# Altium PCB main_board_2018-12-19.PcbDoc
Units mm, origin at the board's own origin, x right, y up, seen from the top; angles counter-clockwise.
Board outline 60.01 x 79.7 mm, 2 copper layers (Top Layer, Bottom Layer); 86 components, 70 nets, 351 pads, 182 vias.
Unrouted connection lines stored in the file: 3.
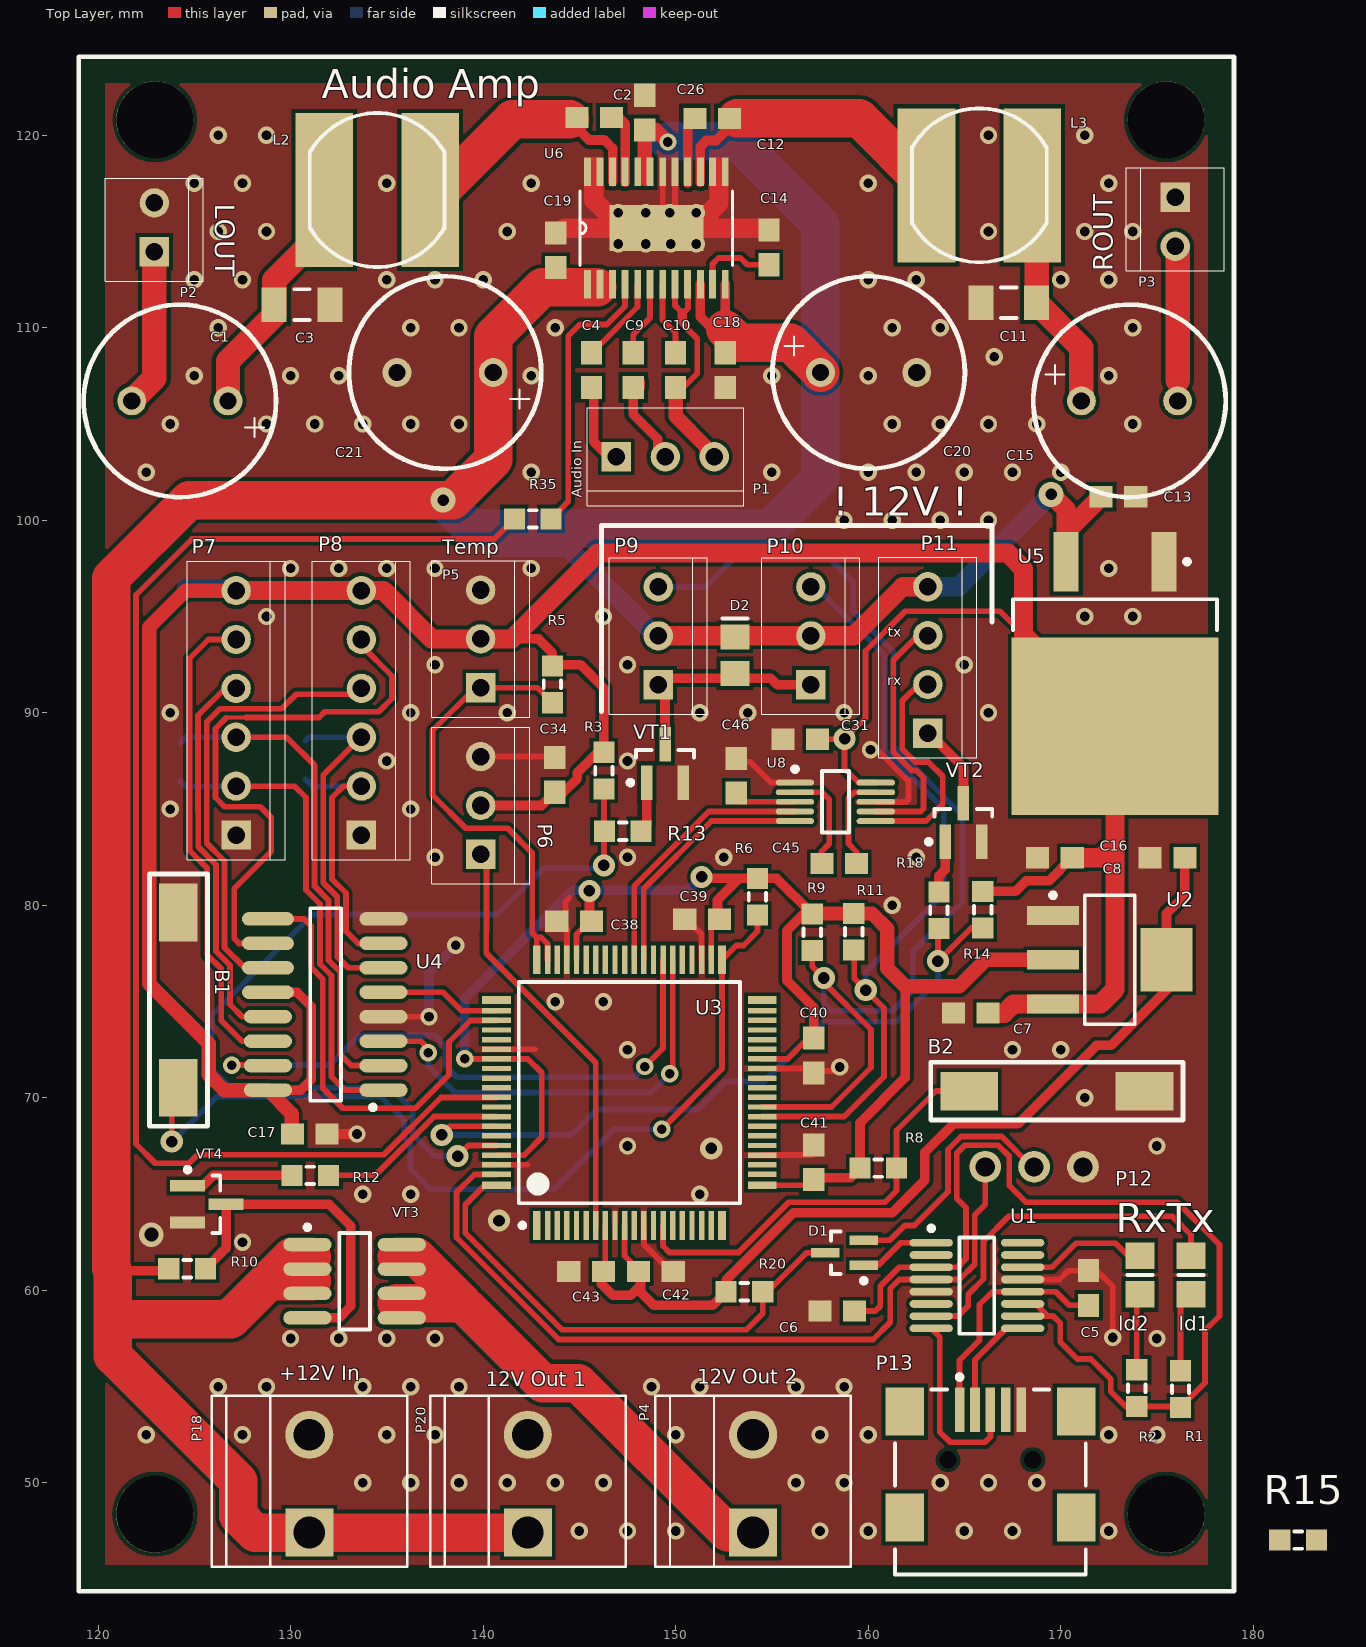
[diagram p0: Top Layer view]
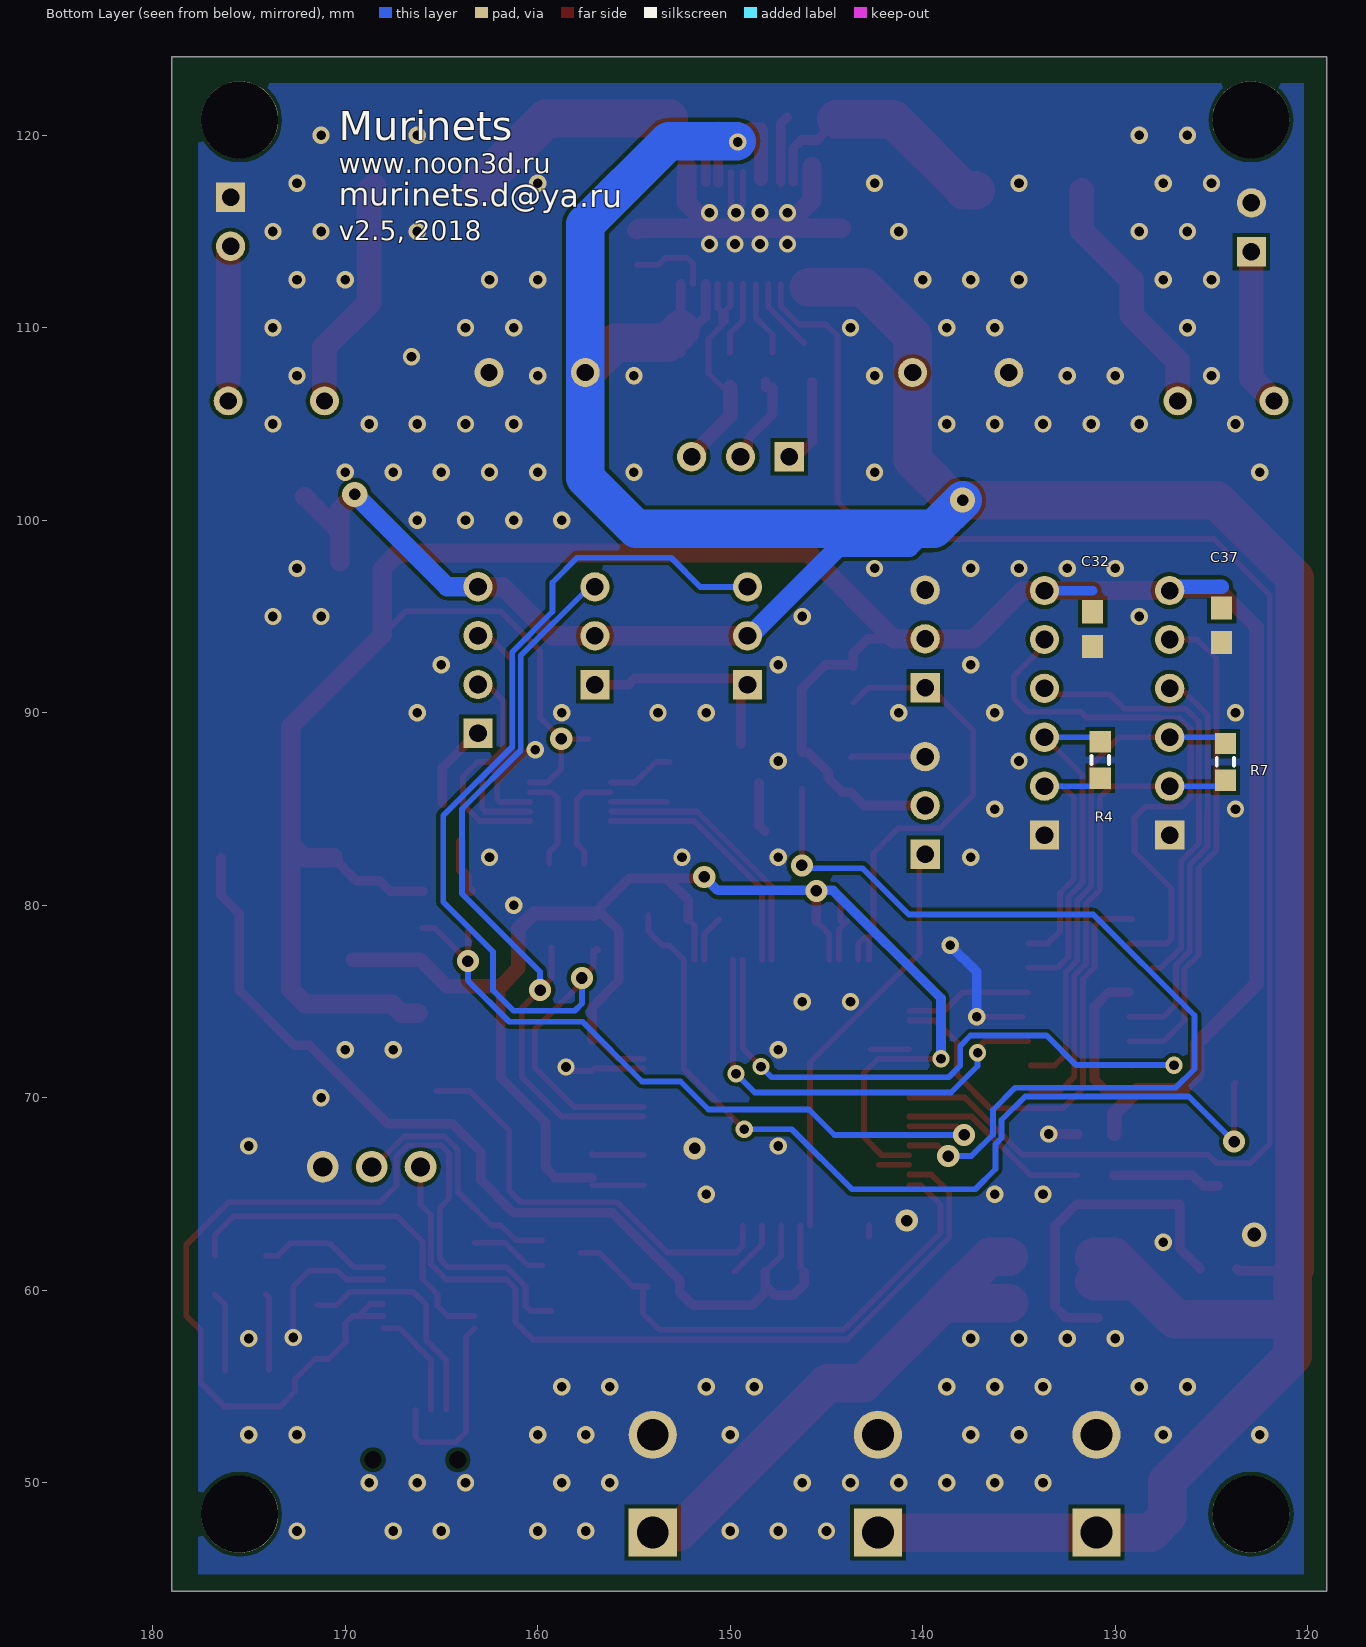
[diagram p1: Bottom Layer view, seen from below]

## Layer stack, top to bottom
Top Solder: solder mask 0.0102, Solder Resist, Dk 3.5
Top Layer: signal copper 0.0356
Dielectric1: dielectric 0.32, FR-4, Dk 4.8
Bottom Layer: signal copper 0.0356
Bottom Solder: solder mask 0.0102, Solder Resist, Dk 3.5

## Board outline
119,44.375 119,124.075 179.006,124.075 179.006,44.375

## Design rules (kind name [scope] priority, off if disabled: settings)
Clearance Clearance_polygon [InPolygon] p1: gap=0.2 ignorepadtopadclearanceinfootprint=FALSE except(0: Arc-Hole Track-Hole SMDPad-Hole THPad-Hole Via-Hole Fill-Hole Poly-Hole Region-Hole Text-Hole)
Clearance [All] p2: gap=0.15 ignorepadtopadclearanceinfootprint=FALSE except(0: Arc-Hole Track-Hole SMDPad-Hole THPad-Hole Via-Hole Fill-Hole Poly-Hole Region-Hole Text-Hole)
PolygonConnect [IsPad And InNet('GND')] p1: connectstyle=Direct reliefconductorwidth=0.508 reliefentries=4 polygonreliefangle="90 Angle" airgapwidth=0.254
PolygonConnect ViaCon [IsVia And InNet('GND')] p2: connectstyle=Direct reliefconductorwidth=0.508 reliefentries=4 polygonreliefangle="90 Angle" airgapwidth=0.254
RoutingVias [All] p1: holewidth=0.6 width=1.15 viastyle="Through Hole" minholewidth=0.5 minwidth=0.9 maxholewidth=1 maxwidth=1.3
SolderMaskExpansion [All] p1: expansion=0.102
Width [All] p1: maxlimit=5.81 minlimit=0.2 preferedwidth=0.305 minimp=50.000000 maximp=50.000000 favimp=50.000000
30 further rules are at their usual default settings.

## Components (designator, comment, footprint, x,y, rotation, side; value= is the part's Value field where it differs from the comment)
B1 "smd button" "BUTTON SMD" 124.175,76.625 r270 top
B2 "smd button" "BUTTON SMD" 171.35,70.35 r180 top
C1 "470. x 25V" CAP+_D10_dip 126.75,106.2 r270 top
C2 "0,22uF" CAPC1608M 145.775,120.925 r0 top
C3 "0.68uF" CAPC3216N 130.6,111.2 r180 top
C4 "1uF" CAPC1608M 145.625,107.8 r90 top
C5 "0.1uF" CAPC1608M 171.45,60.125 r270 top
C6 "0.1uF" CAPC1608M 158.4,58.925 r180 top
C7 "1uF" CAPC1608M 165.325,74.4 r180 top
C8 "1uF" CAPC1608M 175.55,82.475 r180 top
C9 "1uF" CAPC1608M 147.8,107.8 r270 top
C10 "1uF" CAPC1608M 150,107.8 r90 top
C11 "0.68uF" CAPC3216N 167.3,111.3 r180 top
C12 "0,22uF" CAPC1608M 151.9,120.875 r0 top
C13 "10uF" CAPC1608M 173,101.225 r0 top
C14 "1uF" CAPC1608M 154.85,114.175 r270 top
C15 "470. x 25V" CAP+_D10_dip 171.075,106.2 r90 top
C16 "10uF" CAPC1608M 169.7,82.475 r180 top
C17 "0.1uF" CAPC1608M 131,68.125 r0 top
C18 "1uF" CAPC1608M 152.575,107.8 r90 top
C19 "1uF" CAPC1608M 143.775,114.025 r90 top
C20 "470. x 25V" CAP+_D10_dip 157.525,107.675 r90 top
C21 "470. x 25V" CAP+_D10_dip 140.525,107.675 r270 top
C26 "0.1uF" CAPC1608M 148.4,121.175 r270 top
C31 "0.1uF" CAPC1608M 156.475,88.625 r0 top
C32 "0.1uF" CAPC1608M 131.175,94.35 r90 bottom
C34 "1uF" CAPC1608M 143.725,86.775 r90 top
C37 "0.1uF" CAPC1608M 124.475,94.55 r90 bottom
C38 "0.1uF" CAPC1608M 144.725,79.175 r0 top
C39 "0.1uF" CAPC1608M 151.375,79.275 r0 top
C40 "0.1uF" CAPC1608M 157.175,72.2 r90 top
C41 "0.1uF" CAPC1608M 157.175,66.65 r270 top
C42 "0.1uF" CAPC1608M 148.975,60.975 r180 top
C43 "0.1uF" CAPC1608M 145.35,60.975 r0 top
C45 "0.1uF" CAPC1608M 158.5,82.175 r180 top
C46 "0.1uF" CAPC1608M 153.15,86.725 r90 top
D1 "diode Schottky  BAT54AW" SOT323-3AM 158.775,61.95 r180 top
D2 "1N4448WS" CD2012-0805 153.075,93 r90 top
L2 "22 мкГн" SDR0805 137.25,117.156 r180 top
L3 "22 мкГн" SDR0805 163.025,117.4 r0 top
ld1 "green led" RESC2012M 176.775,60.8 r270 top
ld2 "red led" RESC2012M 174.125,60.8 r270 top
P1 "WF-3" WF-3 146.925,103.3 r0 top
P2 "WF2" WF-2 122.925,113.95 r90 top
P3 "WF2" WF-2 175.95,116.775 r270 top
P4 "MPW-2" MPW-2 154.025,47.425 r90 top
P5 "WF-3" WF-3 139.875,91.3 r90 top
P6 "WF-3" WF-3 139.875,82.645 r90 top
P7 "6-pin" WF-6 127.175,83.65 r90 top
P8 "6-pin" WF-6 133.675,83.65 r90 top
P9 "WF-3" wf-3 149.1,91.46 r90 top
P10 "WF-3" wf-3 157.025,91.46 r90 top
P11 "wf-4" WF-4 163.1,88.93 r90 top
P12 "3-pin" CONN_3_2.54 169.9,66.425 r180 top
P13 "USB-MINI" "USB/SM0.8-6H5 - step" 166.35,45.95 r270 top
P18 "MPW-2" MPW-2 130.975,47.42 r90 top
P20 "MPW-2" MPW-2 142.325,47.42 r90 top
R1 "1K" RESC1608M 176.225,54.875 r90 top
R2 "1K" RESC1608M 173.95,54.925 r90 top
R3 "4.7K" RESC1608M 146.275,87 r90 top
R4 "100" RESC1608M 130.775,87.55 r90 bottom
R5 "10k" RESC1608M 143.6,91.475 r90 top
R6 "10K" RESC1608M 154.25,80.45 r90 top
R7 "100" RESC1608M 124.275,87.45 r90 bottom
R8 "10K" RESC1608M 160.525,66.35 r180 top
R9 "10K" RESC1608M 157.1,78.6 r90 top
R10 "1K" RESC1608M 124.625,61.125 r180 top
R11 "10K" RESC1608M 159.25,78.625 r90 top
R12 "10K" RESC1608M 131.025,65.975 r180 top
R13 "4.7K" RESC1608M 147.25,83.85 r0 top
R14 "4.7K" RESC1608M 165.95,79.775 r90 top
R15 "10K" RESC1608M 182.334,47.027 r0 top
R18 "4.7K" RESC1608M 163.675,79.75 r90 top
R20 "10K" RESC1608M 153.575,59.925 r180 top
R35 "10k" RESC1608M 142.575,100.075 r0 top
U1 "FT230X" SOP635P600-16N 165.65,60.25 r0 top
U2 "LD1117S33TR" SOT223-4M_2-4SC 172.55,77.175 r0 top
U3 "LPC1758FBD80" SOT315-1_V 147.6,70.275 r90 top
U4 "SN65C1167" "SOIC127P600-16M - INCREASE WIDTH" 131.825,74.85 r180 top
U5 "LD1086D2T" TO254P1280-3_4M 172.825,92.05 r270 top
U6 "TPA3123D2" SOP65P640X120-25N 149,115.175 r90 top
U8 "ADM101E" TSSOP50P490-10AM 158.3,85.375 r0 top
VT1 "IRFML8244" SOT23-3M 149.45,87.375 r90 top
VT2 "IRFML8244" SOT23-3M 164.95,84.3 r90 top
VT3 "IRFML7240" SOIC127P600-8M 133.325,60.475 r0 top
VT4 "BSS138" SOT23-3M 125.65,64.475 r0 top

## Footprints (in the part's own frame and the unit in brackets; to place one, negate y for a bottom-side part, rotate by r counter-clockwise, add the part's x,y. Pads: shape width x height; smd on the part's side, far side on the other; paste and mask are expansions set on the pad)
"BUTTON SMD" [mm]
  rect 3x2 smd: 1(6.1,0) 2(-3,0)
  silkscreen extent -5,-1.5 8.1,1.5, body extent -5,-1.5 8.1,1.5, height 5
CAP+_D10_dip [mm]
  round 1.5 hole 0.9: 1(0,0) 2(0,-5)
  silkscreen extent -5,-7.5 5,2.5
CAPC1608M [mm] "Chip Capacitor, Body 1.6x0.8mm, IPC Low Density"
  rect 1.2x1.1 smd: 1(-0.9,0) 2(0.9,0)
  body extent -0.87,-0.48 0.87,0.48, height 0.85
CAPC3216N [mm] "Chip Capacitor, Body 3.2x1.6mm, IPC Medium Density"
  rect 1.3x1.8 smd: 1(-1.45,0) 2(1.45,0)
  silkscreen extent -0.4,-0.8 0.4,0.8, body extent -1.7,-0.9 1.7,0.9, height 1.35
CD2012-0805 [mm] "Chip Diode; Body 2.0 x 1.3 mm (LxW typ)"
  rect 1.3x1.5 smd: 1(-0.95,0) 2(0.95,0)
  silkscreen extent 1.9,-0.65 1.9,0.65
CONN_3_2.54 [mm] "connector 2.54"
  round 1.65 hole 1: 1(-1.26,0.01) 2(1.28,0.01) 3(3.82,0.01)
  body extent -2.53,-1.26 5.18,1.28, height 8.54
MPW-2 [mm]
  rect 2.5x2.5 hole 1.65: 1(0,0)
  round 2.5 hole 1.65: 2(5.08,0)
  silkscreen extent -1.78,-5.08 7.11,5.08
RESC1608M [mm] "Chip Resistor, Body 1.6x0.8mm, IPC Low Density"
  rect 1.1x1.1 smd: 1(-0.95,0) 2(0.95,0)
  silkscreen extent -0.2,-0.45 0.2,0.45, body extent -0.85,-0.48 0.85,0.48, height 0.6
RESC2012M [mm] "Chip Resistor, Body 2.0x1.3mm, IPC Low Density"
  rect 1.4x1.5 smd: 1(-1,0) 2(1,0)
  silkscreen extent 0,-0.65 0,0.65, body extent -1.07,-0.7 1.07,0.7, height 0.65
SDR0805 [mm] "SDR 0805 series"
  rect 3x8 smd: 1(0,0) 2(5.5,0)
  silkscreen extent -0.75,-4 6.25,4
SOIC127P600-8M [mm] "SOIC, 8-Leads, Body 4.9x3.9mm, Pitch 1.27mm, IPC Low Density"
  oval 2.5x0.7 smd: 1(-2.45,1.905) 2(-2.45,0.635) 3(-2.45,-0.635) 4(-2.45,-1.905) 5(2.45,-1.905) 6(2.45,-0.635) 7(2.45,0.635) 8(2.45,1.905)
  silkscreen extent -2.57,-2.5 0.8,2.93, body extent -2,-2.5 2,2.5, height 1.75
"SOIC127P600-16M - INCREASE WIDTH" [mm] "SOIC, 16-Leads, Body 9.9x3.9mm, Pitch 1.27mm, IPC Low Density"
  oval 2.5x0.7 smd: 1(-3,4.445) 2(-3,3.175) 3(-3,1.905) 4(-3,0.635) 5(-3,-0.635) 6(-3,-1.905) 7(-3,-3.175) 8(-3,-4.445) 13(3,0.635) 14(3,1.905) 15(3,3.175) 16(3,4.445)
  oval 2.7x0.7 smd: 9(3,-4.445) 10(3,-3.175) 11(3,-1.905) 12(3,-0.635)
  silkscreen extent -2.58,-5 0.8,5.47, body extent -2,-5 2,5, height 1.75
SOP65P640X120-25N [mil]
  rect 58x14 smd: 1(-115,141) 2(-115,115) 3(-115,90) 4(-115,64) 5(-115,38) 6(-115,13) 7(-115,-13) 8(-115,-38) 9(-115,-64) 10(-115,-90) 11(-115,-115) 12(-115,-141) 13(115,-141) 14(115,-115) 15(115,-90) 16(115,-64) 17(115,-38) 18(115,-13) 19(115,13) 20(115,38) 21(115,64) 22(115,90) 23(115,115) 24(115,141)
  rect 94x192 smd: 25(0,0)
  silkscreen extent -76,-156 76,156
SOP635P600-16N [mm] "SOP, 16-Leads, Body 4.9x3.9mm, Pitch 0.635mm, IPC Medium Density"
  oval 2.25x0.4 smd: 1(-2.375,2.222) 2(-2.375,1.587) 3(-2.375,0.953) 4(-2.375,0.318) 5(-2.375,-0.318) 6(-2.375,-0.953) 7(-2.375,-1.587) 8(-2.375,-2.222) 9(2.375,-2.222) 10(2.375,-1.587) 11(2.375,-0.953) 12(2.375,-0.318) 13(2.375,0.318) 14(2.375,0.953) 15(2.375,1.587) 16(2.375,2.222)
  silkscreen extent -2.5,-2.5 0.9,3.1, body extent -1.99,-2.5 1.99,2.5, height 1.76
SOT23-3M [mm] "SOT23, 3-Leads, Body 2.9x1.3mm, Pitch 0.95mm, Lead Span 2.5mm, IPC Low Density"
  rect 1.8x0.6 smd: 1(-1,0.95) 2(-1,-0.95) 3(1,0)
  silkscreen extent -1.12,-1.5 0.7,1.92, body extent -0.7,-1.5 0.7,1.5, height 1.1
SOT223-4M_2-4SC [mm] "SOT223, 4-Leads, Body 6.5x3.5mm, Pitch 2.3mm, Lead Span 7mm, IPC Low Density"
  rect 2.7x1 smd: 1(-2.95,2.3) 2(-2.95,0) 3(-2.95,-2.3)
  rect 2.7x3.3 smd: 4(2.95,0)
  silkscreen extent -3.07,-3.35 1.3,3.47, body extent -1.85,-3.35 1.85,3.35, height 1.8
SOT315-1_V [mm] "Thin QFP, 80-Leads, Body 12x12mm, Pitch 0.5mm, NXP Recommended"
  rect 1.5x0.4 smd: 1(-6.9,4.81) 20(-6.9,-4.81) 41(6.9,-4.81) 60(6.9,4.81)
  rect 1.5x0.28 smd: 2(-6.9,4.25) 3(-6.9,3.75) 4(-6.9,3.25) 5(-6.9,2.75) 6(-6.9,2.25) 7(-6.9,1.75) 8(-6.9,1.25) 9(-6.9,0.75) 10(-6.9,0.25) 11(-6.9,-0.25) 12(-6.9,-0.75) 13(-6.9,-1.25) 14(-6.9,-1.75) 15(-6.9,-2.25) 16(-6.9,-2.75) 17(-6.9,-3.25) 18(-6.9,-3.75) 19(-6.9,-4.25) 42(6.9,-4.25) 43(6.9,-3.75) 44(6.9,-3.25) 45(6.9,-2.75) 46(6.9,-2.25) 47(6.9,-1.75) 48(6.9,-1.25) 49(6.9,-0.75) 50(6.9,-0.25) 51(6.9,0.25) 52(6.9,0.75) 53(6.9,1.25) 54(6.9,1.75) 55(6.9,2.25) 56(6.9,2.75) 57(6.9,3.25) 58(6.9,3.75) 59(6.9,4.25)
  rect 0.4x1.5 smd: 21(-4.81,-6.9) 40(4.81,-6.9) 61(4.81,6.9) 80(-4.81,6.9)
  rect 0.28x1.5 smd: 22(-4.25,-6.9) 23(-3.75,-6.9) 24(-3.25,-6.9) 25(-2.75,-6.9) 26(-2.25,-6.9) 27(-1.75,-6.9) 28(-1.25,-6.9) 29(-0.75,-6.9) 30(-0.25,-6.9) 31(0.25,-6.9) 32(0.75,-6.9) 33(1.25,-6.9) 34(1.75,-6.9) 35(2.25,-6.9) 36(2.75,-6.9) 37(3.25,-6.9) 38(3.75,-6.9) 39(4.25,-6.9) 62(4.25,6.9) 63(3.75,6.9) 64(3.25,6.9) 65(2.75,6.9) 66(2.25,6.9) 67(1.75,6.9) 68(1.25,6.9) 69(0.75,6.9) 70(0.25,6.9) 71(-0.25,6.9) 72(-0.75,6.9) 73(-1.25,6.9) 74(-1.75,6.9) 75(-2.25,6.9) 76(-2.75,6.9) 77(-3.25,6.9) 78(-3.75,6.9) 79(-4.25,6.9)
  silkscreen extent -7.02,-5.75 5.75,5.75, body extent -6,-6 6,6, height 1.6
SOT323-3AM [mm] "SOT323, 3-Leads, Body 2.0x1.3mm, Pitch 0.65mm, Lead Span 2.1mm, IPC Low Density"
  rect 1.5x0.5 smd: 1(-1,0.65) 2(-1,-0.65) 3(1,0)
  silkscreen extent -1.13,-1.1 0.7,1.57, body extent -0.7,-1.1 0.7,1.1, height 1
TO254P1280-3_4M [mm] "TO, 4-Leads, Body 9.6x10.2mm, Pitch 2.54mm, Lead Span 12.8mm, IPC Low Density"
  rect 3.1x1.3 smd: 1(-5.8,2.54) 3(-5.8,-2.54)
  rect 9.2x10.75 smd: 4(2.75,0)
  silkscreen extent -5.92,-5.3 -2.25,5.3, body extent -8.13,-5.32 7.72,5.32, height 4.8
TSSOP50P490-10AM [mm] "TSSOP, 10-Leads, Body 3x3mm, Pitch 0.5mm, IPC Low Density"
  oval 2x0.3 smd: 1(-2.1,1) 2(-2.1,0.5) 3(-2.1,0) 4(-2.1,-0.5) 5(-2.1,-1) 6(2.1,-1) 7(2.1,-0.5) 8(2.1,0) 9(2.1,0.5) 10(2.1,1)
  silkscreen extent -2.22,-1.6 0.7,1.82, body extent -1.6,-1.6 1.6,1.6, height 1.1
"USB/SM0.8-6H5 - step" [mm] "Connector; USB2.0, Type B, SM; 5 Position; Right Angle"
  rect 2.3x0.5 smd: 1(-7.85,-1.6) 2(-7.85,-0.8) 3(-7.85,0) 4(-7.85,0.8) 5(-7.85,1.6)
  rect 2.5x2 smd: 6(-7.75,4.45) 7(-2.25,4.45) 8(-7.75,-4.45) 9(-2.25,-4.45)
  round 0.6 hole 0.9 unplated: MH1(-5.25,2.2) MH2(-5.25,-2.2)
  silkscreen extent -9.67,-4.95 0.7,4.95, body extent -9.25,-5.35 1.25,5.35, height 3.9
WF-2 [mil]
  rect 60x60 hole 36: 1(0,0)
  round 60 hole 36: 2(100,0)
  silkscreen extent -60,-100 150,100, body extent -60,-100 150,100, height 394
WF-3 [mil]
  rect 60x60 hole 36: 1(0,0)
  round 60 hole 36: 2(100,0) 3(200,0)
  silkscreen extent -60,-100 260,100, body extent -60,-100 260,100, height 394
wf-3 [mil]
  rect 60x60 hole 36: 1(0,0)
  round 60 hole 36: 2(100,0) 3(200,0)
  silkscreen extent -60,-100 260,100, body extent -60,-100 260,100, height 394
WF-4 [mil]
  rect 60x60 hole 36: 1(0,0)
  round 60 hole 36: 2(100,0) 3(200,0) 4(300,0)
  silkscreen extent -50,-100 360,100, body extent -50,-100 360,100, height 394
WF-6 [mil]
  rect 60x60 hole 36: 1(0,0)
  round 60 hole 36: 2(100,0) 3(200,0) 4(300,0) 5(400,0) 6(500,0)
  silkscreen extent -50,-100 560,100, body extent -50,-100 560,100, height 394

## Part data
B1: library part "chip button", "boot", Type=Кнопка
B2: library part "chip button", "reset", Type=Кнопка
C1 C15 C20 C21: library part Cap+, "Tantalum and aluminium electrolytic capacitors", Type=Конденсатор, ValueSCH="470. x 25V"
C2 C12: library part Cap, "Ceramic capacitors", voltage="25 V", Type=Конденсатор, ValueSCH=0,22uF
C3 C11: library part CPER_10NF_400V_10%_500-300X720X650, "Non-polarised capacitor", Case="LS5 W3 x L7.2 x H6.5", Manufacturer=EPCOS, Manufacturer Part Number=B32529C6103K000, Tolerance=±10%, voltage=400VDC/200VAC, Author="CERN DEM JLC", ComponentHeight=6.5mm, Component Type=Standard, CreateDate=23.03.2009, HelpURL=\\cern.ch\dfs\Applications\Altium\Datasheets\CPER_EPCOS_B32529.pdf, LatestRevisionDate=23.03.2009, Mounted=Yes, Part Description="Metallized Polyester Film Capacitor (MKT)", Part Number=CPER_10NF_400V_10%_500-300X720X650, Pin Count=2, SMD=No, Socket=No, Status=None, Table="Capacitors THD", Type=Конденсатор, ValueSCH=0.68uF
C4 C5 C6 C9 C10 C17 C18 C19 C26 C31 C32 C37 C45: library part Cap, "Ceramic capacitors", Type=Конденсатор
  C4 C9 C10 C18 C19: ValueSCH=1uF
  C5 C6 C17 C26 C31 C32 C37 C45: ValueSCH=0.1uF
C7 C8 C13 C16 C34 C38 C39 C40 C41 C42 C43 C46: library part Cap, "Capacitor", LatestRevisionDate=17-Jul-2002, LatestRevisionNote="Re-released for DXP Platform.", PackageDescription="Radial Cap, Thru-Hole; 2 Leads; 0.3 in Pin Spacing", PackageReference=RAD-0.3, Published=8-Jun-2000, Publisher="Altium Limited", Type=Конденсатор
  C7 C8 C34: ValueSCH=1uF
  C13 C16: ValueSCH=10uF
  C38 C39 C40 C41 C42 C43 C46: ValueSCH=0.1uF
C14: library part Cap, "Ceramic capacitors", voltage="16 V", Type=Конденсатор, ValueSCH=1uF
D1: "Schottky BAT54AW", Type=Диод
D2: library part MBRS360T3, Type=Диод
L2 L3: library part Ind, "Coils", Type=Индуктивность, ValueSCH="22 мкГн"
ld1 ld2: library part "chip led", "chip led"
  ld2: Type=Резистор
P9 P10: library part 3-pin, Type=Разъём
P11: library part 4-pin, Type=Разъём
R1 R2: library part Res2, "Resistor", LatestRevisionDate=17-Jul-2002, LatestRevisionNote="Re-released for DXP Platform.", PackageDescription="Axial Device, Thru-Hole; 2 Leads; 0.4 in Pin Spacing", PackageReference=AXIAL-0.4, Published=8-Jun-2000, Publisher="Altium Limited", Type=Резистор, ValueSCH=1K
R3 R4 R5 R6 R7 R8 R9 R10 R11 R12 R13 R14 R15 R18 R20 R35: library part Res, "Ceramic resisors", Type=Резистор
  R3 R13 R14 R18: ValueSCH=4.7K
  R4 R7: ValueSCH=100
  R5 R35: ValueSCH=10k
  R6 R8 R9 R11 R12 R15 R20: ValueSCH=10K
  R10: ValueSCH=1K
U2: library part LD1117, Type=Микросхема
U3: "32-bit ARM Cortex-M3 MCU, 512 kB Flash, 64 kB SRAM, 100 MHz, USB 2.0 Device/Host/OTG, Ethernet, CAN, 12-Bit ADC, DAC, I2S, 80-Pin LQFP", ADC channels=6, CAN=2, Code_IEC=136E15, Code_JEDEC=MS-026, ComponentLink1Description="Manufacturer URL", ComponentLink1URL=http://www.nxp.com/, ComponentLink2Description=Datasheet, ComponentLink2URL=http://www.nxp.com/documents/data_sheet/LPC1759_58_56_54_52_51.pdf, DatasheetVersion="Rev. 7, Mar-2011", Flash="512 kB", fmax="100 MHz", GPIOs=52, PackageDescription="LQFP80: Plastic Low Profile Quad Flat Package; 80 Leads; Body 12 x 12 x 1.4 mm", PackageReference=SOT315-1, PackageVersion=Feb-2003, PartNumber=LPC1758FBD80, PLL=Y, PWM=6, SPI=1, SRAM="64 kB", SSP=2, Timers=4, Type=Микросхема, UART=4, USB=1, VDD (max)="3.6 V", VDD (min)="2.4 V", VDD (typ)="3.3 V"
U4: "RS-422 Dual Differential Drivers and Receivers", Type=Микросхема
U5: "st LD1086D2T", Type=Микросхема
U6: "25-W STEREO CLASS-D AUDIO POWER AMPLIFIER"
U8: "Tiny RS-232 Transceiver", PartType=Микросхема, Type=Микросхема
VT1 VT2: "MOSFET N", Type=Транзистор
VT3: "MOSFET P", Type=Транзистор
VT4: library part IRFML8244, "MOSFET N", Type=Транзистор
P1 P2 P3 P4 P5 P6 P7 P8 P12 P13 P18 P20: Type=Разъём
U1: Type=Микросхема

## Free pads (board coordinates)
  round 4 hole 4: 1(122.95,48.375) 1(122.95,120.8) 1(175.475,48.375) 1(175.475,120.8)

## Via types
v1: diameter 0.9, hole 0.5, Top Layer to Bottom Layer, 167 vias
v2: diameter 1.15, hole 0.6, Top Layer to Bottom Layer, 12 vias
v3: diameter 1.3, hole 0.6, Top Layer to Bottom Layer, 2 vias
v4: diameter 1.27, hole 0.711, Top Layer to Bottom Layer, 1 vias

## Nets (pads, with @x,y where several pads share a name; then routed paths per layer and width w, separated by ;. In a path a pad name is that pad's centre, name@x,y a point inside that pad or via, vN(x,y) a via of type N, cw(c..) or ccw(c..) an arc to the next point about the centre after c; other vN are vias at no path point)
3V3_FTDI: C6.1 R1.1 R2.1 U1.3 U1.10 U1.11 | length 52
  Top Layer w0.3: C6.1 160.375,58.925 160.625,59.175 160.625,60.211 161.616,61.202 U1.3 164.653,61.202 165.088,61.637 165.088,64.287 164.6,64.775 164.6,67.125 165.015,67.54 166.75,67.54 167.325,66.965 167.325,65.45 168.2,64.575 176.05,64.575 178.25,62.375 178.25,58.675 177.5,57.925 177.5,55.2 R1.1 176.175,53.975 R2.1 173.375,53.975 172.6,54.75 172.6,55.4 171.562,56.437 170.863,56.437 169.975,57.325 169.975,58.3 169.613,58.662 169.337,58.662 ; U1.10 169.337,58.662 ; U1.11 168.702,59.297 169.337,58.662
+3.3: C8.1 C38.2 C39.2 C40.2 C41.2 C42.2 C43.2 R6.2 R8.2 R9.2 R11.2 R20.2 U2.2 U2.4 U3.8 U3.10 U3.21 U3.34 U3.42 U3.56 U3.67 U3.77 | length 138.5
  Top Layer w0.3: v1(139.05,72.025) U3.67 142.325,72.025 143.05,71.3 143.05,67.95 142.125,67.025 U3.77 ; U3.56 144.85,78.5 C38.2@145.525,79.175 ; C43.2@146.15,60.975 146.35,61.175 U3.8 ; U3.10 147.35,61.8 C42.2@148.175,60.975 ; U3.42 151.85,78.95 C39.2@152.175,79.275 ; U3.21 C41.2@157.165,65.465 ; U3.34 155.825,72.025 156.8,73 C40.2@157.175,73
  Top Layer w0.5: C38.2@145.525,79.175 v2(145.525,80.75) ; C43.2@146.15,60.975 146.15,60.325 146.725,59.75 147.675,59.75 148.175,60.25 ; C42.2@148.175,60.975 148.175,60.25 ; v2(151.35,81.475) 151.425,81.4 153.3,81.4 ; C39.2@152.175,79.275 152.175,80.275 153.3,81.4 ; C41.2@157.175,65.85 159.075,65.85 R8.2 159.575,68.7 161.925,71.05 161.925,75.8 ; C40.2@157.175,73 157.175,74.7 155.788,76.087 155.788,78.688 156.65,79.55 R9.2 155.25,81.4 R6.2 153.3,81.4 ; C8.1 176.45,80.525 175.5,79.575 U2.4 175.5,75.6 172.625,72.725 171.85,72.725 167.775,68.65 164.425,68.65 162.95,67.175 162.95,65.725 161.25,64.025 156.103,64.025 152.625,60.547 R20.2 151.925,59.225 148.875,59.225 148.175,59.925 148.175,60.25
  Top Layer w0.75: R9.2 157.125,79.575 R11.2 160.2,79.575 161,78.775 161,76.725 161.925,75.8 164.725,75.8 166.1,77.175 U2.2
  Bottom Layer w0.5: v1(139.05,72.025) 139.05,75.175 144.65,80.775 150.65,80.775 v2(151.35,81.475)
+5: C7.1 C16.1 C17.1 C31.2 C32.2 C34.1 C37.2 P5.2 P6.2 P7.6 P8.6 R3.2 R5.2 R14.2 R15.2 U2.3 U4.12 U4.16 U5.4 U8.10 | length 169.5
  Top Layer w0.3: C31.2 v2@158.775,88.625 ; U8.10 159.5,86.375 158.775,87.1 v2@158.775,88.625 ; 168.075,94.05 166.85,95.275 161.925,95.275 159.862,93.212 159.862,89.737 v2(158.775,88.65) v2@158.775,88.625
  Top Layer w0.5: U4.16 130.53,70.405 131.075,70.95 131.075,74.75 130.34,75.485 U4.12@129.275,75.485 ; P6.2 143.035,85.185 C34.1 144.175,85.875 144.9,86.6 144.9,86.9 145.95,87.95 R3.2 146.275,91.275 145.05,92.5 143.675,92.5 R5.2 143.6,93.115 142.875,93.84 141.49,93.84 ; R14.2 167.65,80.725 168.2,81.275 169.4,81.275 C16.1
  Top Layer w0.75: P7.6 124.55,96.35 122.65,94.45 122.65,75.925 125.75,72.825 125.75,71.2 126.545,70.405 U4.16 130.05,69.18 C17.1@130.05,68.125
  Top Layer w1: P7.6 P8.6 134.825,96.35 137.335,93.84 P5.2 141.49,93.84 145.95,98.3 167.25,98.3 168.075,97.475 168.075,94.05 U5.4 172.825,83.2 ; C7.1 167.075,74.4 167.55,74.875 U2.3 172.075,74.875 172.825,75.625 172.825,83.2 ; C16.1 172.1,82.475 172.825,83.2
  Bottom Layer w0.5: 131.175,96.35 P8.6
  Bottom Layer w0.75: 124.475,96.55 126.975,96.55 P7.6
"+5 USB": C5.2 P13.1 U1.12 | length 12.1
  Top Layer w0.3: P13.1 164.75,56.375 165.788,57.413 165.788,59.263 166.457,59.932 U1.12 169.743,59.932 170.45,59.225 C5.2
+12: C13.1 C18.2 C19.1 C20.1 C21.1 C26.2 D2.2 P9.2 P10.2 P11.4 P18.1 P20.1 R10.2 U5.3 U6.1 U6.2 U6.3 U6.10 U6.12 U6.19 U6.20 VT3.1 VT3.2 VT3.3 | length 224.3
  Top Layer w0.5: 120.775,61.025 123.575,61.025 R10.2 ; U6.10@151.275,112.275 151.275,110.575 C18.2@152.575,109.275 ; C18.2 C18.2@152.575,109.275 ; U6.12@152.575,112.275 152.575,109.925 C18.2@152.575,109.275
  Top Layer w0.75: 148.4,117.75 C26.2 148.975,120.275 v1(149.6,119.65)
  Top Layer w1: P9.2 151.925,94 ; 151.55,94 P10.2 159.25,94 161.8,96.55 P11.4 ; v3(169.5,101.35) 170.285,100.565 170.285,99.41 ; U5.3 170.285,99.41 ; C13.1 170.285,99.41
  Top Layer w2: 127.075,58.775 130.05,61.75 131.1,61.75 ; 131.1,60.475 128.875,60.475 126.9,58.5 120.775,58.5 ; P20.1 P18.1 128.155,47.42 127.288,48.288 127.288,50.098 120.775,56.61 120.775,58.5 ; U6.2@145.925,112.1 143.075,112.1 140.525,109.55 C21.1 140.525,103.15 138.425,101.05 v3(137.925,101.05) 124.725,101.05 120.675,97 120.675,61.125 120.775,61.025 120.775,58.5 ; 152.575,109.925 153.275,109.225 155.975,109.225 C20.1
  Bottom Layer w1: 139.75,99.55 140.7,98.6 144.375,98.6 P9.2@148.975,94 ; P11.4 164.7,96.55 v3(169.5,101.35)
  Bottom Layer w2: v3(137.925,101.05) 139.425,99.55 139.75,99.55 154.875,99.55 157.525,102.2 C20.1 157.525,115.375 153.2,119.7 v1@149.65,119.7
boot: B1.1 R6.1 U3.41 | length 47.5
  Top Layer w0.3: B1.1@123.75,70.8 123.825,70.725 v2(123.825,67.725) ; v1(149.275,68.375) 152.41,71.51 U3.41 153.155,77.92 153.52,77.92 154.25,78.65 R6.1
  Bottom Layer w0.3: v2(123.825,67.725) 126.175,70.075 134.675,70.075 135.9,68.85 135.9,67.914 136.225,67.589 136.225,66.3 137.275,65.25 143.675,65.25 146.8,68.375 v1(149.275,68.375)
BV_gnd: P11.1 VT2.3 | length 4.5
  Top Layer w0.5: P11.1@163.1,89 164.95,87.15 VT2.3
BV_pwr: R14.1 R18.1 U3.74 | length 37.8
  Top Layer w0.3: v2(137.85,68.075) 138.3,68.525 ; 138.25,68.525 138.3,68.525 ; U3.74 138.3,68.525 ; R18.1@163.625,78.65 v2(163.625,77.1) 165.35,78.825 R14.1
  Bottom Layer w0.3: v2(137.85,68.075) 144.575,68.075 145.9,69.4 151.125,69.4 152.575,70.85 154.575,70.85 157.675,73.95 161.475,73.95 163.625,76.1 v2(163.625,77.1)
bv_rs232_rx: P11.2 U8.6 | length 12.2
  Top Layer w0.3: U8.6 163,84.375 163.875,85.25 163.875,86.7 163.125,87.45 162.45,87.45 161.775,88.125 161.775,90.625 162.69,91.54 P11.2@163.145,91.54
bv_rs232_tx: P11.3 U8.7 | length 13.4
  Top Layer w0.3: U8.7 162.725,84.875 162.875,85.025 162.875,86.625 162.5,87 162.264,87 161.3,87.964 161.3,92.725 162.655,94.08 P11.3@163.1,94.08
bv_uart_rx: U3.49 U8.5 | length 13
  Top Layer w0.3: U3.49 148.35,80.864 151.861,84.375 U8.5
bv_uart_tx: U3.50 U8.4 | length 13.8
  Top Layer w0.3: U3.50 147.85,81 151.725,84.875 U8.4
deb_uart_tx: D1.2 P12.2 | length 13
  Top Layer w0.3: D1.2 161.125,62.6 161.9,63.375 162.4,63.375 164.15,65.125 164.15,67.311 164.829,67.99 166.936,67.99 168.511,66.415 P12.2
enc1_data: U3.46 U4.3 | length 23.2
  Top Layer w0.3: U4.3@134.525,72.945 U4.3 136.78,72.945 137.15,72.575 v1(137.15,72.35) ; v1(149.7,71.25) 149.85,71.4 U3.46
  Bottom Layer w0.3: v1(137.15,72.35) 137.15,71.65 138.525,70.275 148.725,70.275 v1(149.7,71.25)
enc1_sck: U3.47 U4.15 | length 31.9
  Top Layer w0.3: v1(126.95,71.7) 129.1,71.7 U4.15@129.125,71.675 ; v1(148.4,71.625) 149.35,72.575 U3.47
  Bottom Layer w0.3: v1(126.95,71.7) 132.025,71.7 133.562,73.237 137.512,73.237 138.05,72.7 138.05,71.675 138.65,71.075 147.85,71.075 v1(148.4,71.625)
enc1in_N: P7.2 R7.1 U4.1 | length 24.5
  Top Layer w0.3: P7.2 130.21,86.19 130.8,85.6 130.8,80.8 131.525,80.075 131.525,76.957 132.125,76.357 132.125,71.1 132.82,70.405 U4.1@134.375,70.405
  Bottom Layer w0.3: R7.1@124.275,86.45 124.535,86.19 P7.2
enc1in_P: P7.3 R7.2 U4.2 | length 25.3
  Top Layer w0.3: P7.3 129.795,88.73 131.25,87.275 131.25,80.986 131.975,80.261 131.975,77.144 132.575,76.544 132.575,72.25 133.15,71.675 U4.2@134.375,71.675
  Bottom Layer w0.3: R7.2@124.275,88.45 124.555,88.73 P7.3
enc1out_N: P7.4 U4.13 | length 21
  Top Layer w0.3: P7.4 126.588,91.27 125.196,89.878 125.196,84.893 125.2,84.889 125.2,83.039 126.125,82.114 126.125,77.614 126.85,76.889 126.85,74.85 127.485,74.215 U4.13 U4.13@129.275,74.215
enc1out_P: P7.5 U4.14 | length 25.6
  Top Layer w0.3: P7.5 125.735,93.81 124.746,92.821 124.746,84.054 124.75,84.05 124.75,82.852 125.675,81.927 125.675,77.427 126.4,76.702 126.4,74.025 127.48,72.945 U4.14 U4.14@129.275,72.945
enc2_data: U3.62 U4.5 | length 6.6
  Top Layer w0.3: U4.5@134.525,75.485 U4.5 137.915,75.485 138.875,74.525 U3.62
enc2_sck: U3.63 U4.9 | length 23.1
  Top Layer w0.3: U4.9@129.125,79.295 130.705,79.295 131.075,78.925 131.075,76.771 131.675,76.171 131.675,70.5 132.712,69.462 136.487,69.462 138.225,71.2 138.225,72.9 139.35,74.025 U3.63
enc2in_N: P8.2 R4.1 U4.7 | length 14
  Top Layer w0.3: P8.2 132.74,86.19 132.15,85.6 132.15,81.359 132.875,80.634 132.875,78.65 133.5,78.025 U4.7@134.525,78.025
  Bottom Layer w0.3: R4.1@130.775,86.55 131.135,86.19 P8.2
enc2in_P: P8.3 R4.2 U4.6 | length 17.7
  Top Layer w0.3: P8.3@133.675,88.43 133.355,88.43 131.7,86.775 131.7,81.173 132.425,80.448 132.425,77.33 133,76.755 U4.6@134.525,76.755
  Bottom Layer w0.3: R4.2@130.775,88.55 130.955,88.73 P8.3
enc2out_N: P8.4 U4.11 | length 22.6
  Top Layer w0.3: U4.11@128.05,76.755 127.62,76.755 126.575,77.8 126.575,82.3 125.65,83.225 125.65,85.075 125.646,85.079 125.646,89.521 126.333,90.208 129.533,90.208 130.295,90.97 P8.4@133.675,90.97
enc2out_P: P8.5 U4.10 | length 29.5
  Top Layer w0.2: 126.658,89.741 126.667,89.75 127.7,89.75
  Top Layer w0.3: 126.658,89.741 126.096,89.179 126.096,85.604 126.575,85.125 128.425,85.125 129,84.55 129,82.8 127.075,80.875 127.075,78.275 127.325,78.025 U4.10 U4.10@129.275,78.025 ; 127.7,89.75 131.475,89.75 131.775,90.05 134.575,90.05 135.275,90.75 135.275,91.91 P8.5@133.675,93.51
Fan: R3.1 R13.1 U3.76 | length 48
  Top Layer w0.3: v2(138.675,66.975) 139.225,67.525 U3.76 ; v2(146.275,82.075) 146.275,83.875 R3.1
  Bottom Layer w0.3: v2(138.675,66.975) 137.475,66.975 136.35,68.1 136.35,69.375 135.2,70.525 126.862,70.525 125.887,71.5 125.887,74.275 131.138,79.525 140.725,79.525 143.125,81.925 146.125,81.925 v2(146.275,82.075)
FT_CTS: U1.6
FT_RTS: U1.2
FT_RX: P12.3 U1.4 U3.79 | length 42.2
  Top Layer w0.3: U3.79 139.55,66.025 138.625,65.1 138.625,62.75 143.925,57.45 160.25,57.45 161.15,58.35 161.15,60.1 161.617,60.567 U1.4 164.75,60.567 165.537,61.355 165.537,63.912 166.08,64.455 P12.3 P12.3@165.85,66.185
FT_RxLed: ld2.1 U1.14 | length 6.9
  Top Layer w0.3: U1.14 169.552,61.202 170.8,62.45 172.85,62.45 173.5,61.8 ld2.1
FT_TX: D1.1 U1.1 | length 4
  Top Layer w0.3: D1.1 160.525,61.3 161.697,62.472 U1.1
FT_TxLed: ld1.1 U1.7 | length 18.6
  Top Layer w0.3: U1.7 164.663,58.662 165.2,59.2 165.2,59.8 165.987,60.587 165.987,62.538 167.3,63.85 175.8,63.85 176.775,62.875 ld1.1
GND: B1.2 B2.2 C3.1 C5.1 C6.2 C7.2 C8.2 C11.2 C13.2 C14.1 C16.2 C17.2 C18.1 C19.2 C20.2 C21.2 C26.1 C31.1 C32.1 C34.2 C37.1 C38.1 C39.1 C40.1 C41.1 C42.1 C43.1 C46.2 P2.2 P3.1 P4.2 P5.3 P6.3 P7.1 P8.1 P12.1 P13.5 P18.2 P20.2 U1.5 U1.13 U2.1 U3.9 U3.12 U3.24 U3.33 U3.43 U3.57 U3.66 U3.78 U4.4 U4.8 U5.1 U6.13 U6.14 U6.17 U6.18 U6.23 U6.24 U6.25 U8.1 U8.8 VT1.2 VT2.2 VT4.2 | length 70.8
  Top Layer w0.3: U1.13 169.942,60.567 170.4,61.025 C5.1 171.875,61.025 172.7,60.2 v1(172.7,57.55)
  Top Layer w0.305: U4.4 v1(137.19,74.215) ; P6.3 143.675,87.725 C34.2 ; U3.78 142.275,66.525 ; U3.66 142.7,72.525 ; C38.1@143.925,79.175 144.35,78.75 U3.57 ; C38.1@144.275,79.175 144.275,80.175 144.475,80.375 ; U3.12 148.35,62.4 C42.1@149.775,60.975 ; U6.18 149.33,116.37 149.7,116 149.965,116.265 U6.17 ; C39.1@150.575,79.275 151.35,78.5 U3.43 ; C46.2@153.15,87.45 153.875,87.45 154.95,86.375 U8.1 ; U3.24 157.125,67.025 C41.1@157.175,67.075 ; U3.33 157.05,71.525 157.175,71.4 158.325,71.4 v1(158.525,71.6) ; v1(160.125,88.075) 160.3,88.25 162.1,86.45 162.1,85.5 161.975,85.375 U8.8
  Top Layer w0.5: C17.2@131.95,68.125 v1(133.45,68.125)
  Top Layer w1: C19.2@144.225,115.175 U6.25@147.2,115.175 ; 145.75,118.375 145.75,116.625 U6.25@147.2,115.175 ; 152.25,118.375 152.25,116.475 U6.25@150.95,115.175 ; C14.1 154.75,115.175 U6.25@150.95,115.175 ; U6.25@147.2,115.175 U6.25 U6.25@150.95,115.175
  Bottom Layer w0.5: v1(137.19,74.215) 137.19,76.54 v1(138.575,77.925)
  other v1: 145,47.5 147.5,47.5 150,47.5 157.5,47.5 160,47.5 165,47.5 167.5,47.5 172.5,47.5 133.75,50 136.25,50 138.75,50 141.25,50 143.75,50 146.25,50 156.25,50 158.75,50 163.75,50 166.25,50 168.75,50 122.5,52.5 127.5,52.5 135,52.5 137.5,52.5 150,52.5 157.5,52.5 160,52.5 172.5,52.5 175,52.5 126.25,55 128.75,55 133.75,55 136.25,55 138.75,55 148.75,55 151.25,55 156.25,55 158.75,55 130,57.5 132.5,57.5 135,57.5 137.5,57.5 175,57.5 127.5,62.5 133.75,65 136.25,65 151.25,65 147.5,67.5 175,67.5 171.25,70 147.5,72.5 167.5,72.5 170,72.5 143.75,75 146.25,75 161.25,80 137.5,82.5 147.5,82.5 152.5,82.5 162.5,82.5 123.75,85 136.25,85 135,87.5 147.5,87.5 123.75,90 136.25,90 141.25,90 151.25,90 153.75,90 158.75,90 166.25,90 137.5,92.5 147.5,92.5 165,92.5 128.75,95 146.25,95 171.25,95 173.75,95 130,97.5 132.5,97.5 135,97.5 137.5,97.5 142.5,97.5 172.5,97.5 158.75,100 161.25,100 163.75,100 166.25,100 122.5,102.5 142.5,102.5 155,102.5 160,102.5 162.5,102.5 165,102.5 167.5,102.5 170,102.5 123.75,105 128.75,105 131.25,105 133.75,105 136.25,105 138.75,105 161.25,105 163.75,105 166.25,105 168.75,105 173.75,105 125,107.5 130,107.5 132.5,107.5 142.5,107.5 155,107.5 160,107.5 172.5,107.5 166.55,108.5 126.25,110 136.25,110 138.75,110 143.75,110 161.25,110 163.75,110 173.75,110 125,112.5 127.5,112.5 135,112.5 137.5,112.5 140,112.5 160,112.5 162.5,112.5 170,112.5 172.5,112.5 147.025,114.35 148.45,114.35 149.75,114.35 151.075,114.35 126.25,115 128.75,115 141.25,115 166.25,115 171.25,115 173.75,115 147.025,115.975 148.45,115.975 149.7,115.975 151.075,115.975 125,117.5 127.5,117.5 135,117.5 142.5,117.5 160,117.5 172.5,117.5 126.25,120 128.75,120 166.25,120 171.25,120
  other v2: 140.825,63.625 151.85,67.375
  other v4: 122.775,62.9
Heat: R12.1 U3.73 | length 10
  Top Layer w0.3: R12.1 134.403,65.975 137.453,69.025 U3.73
L_OUT: C1.2 P2.1 | length 8.2
  Top Layer w1.27: C1.2 122.925,107.375 P2.1
LINE_OUTA: C4.1 P1.1 | length 4.2
  Top Layer w0.5: C4.1@145.75,107.2 145.75,104.075 P1.1@146.525,103.3
LINE_OUTB: C9.2 P1.2 | length 4.4
  Top Layer w0.5: C9.2 147.8,105.5 149.065,104.235 P1.2@149.065,103.3 ; C9.2@148.15,106.9 C9.2@148.15,107.225
LPC_RX_HV: D1.3 R20.1 U3.80 | length 26.8
  Top Layer w0.3: U3.80 140.09,65.465 139.075,64.45 139.075,62.975 144.1,57.95 153.675,57.95 154.525,58.8 R20.1 ; R20.1@154.3,60.175 154.3,60.2 155.05,60.2 156.8,61.95 D1.3
Mute: R35.1 U3.71 | length 70.4
  Top Layer w0.3: U3.71 137.816,70.025 134.841,67.05 125.175,67.05 124.725,66.6 122.975,66.6 121.975,67.6 121.975,96.125 124.875,99.025 140.575,99.025 R35.1
NetC1_1: C1.1 C3.2 L2.2 | length 13
  Top Layer w1.27: C1.1 126.75,108.25 129.15,110.65 C3.2 129.15,112.475 131.75,115.075 L2.2
NetC2_1: C2.1 L2.1 U6.22 | length 12.6
  Top Layer w0.5: 145.05,120.2 145.5,119.75 146.3,119.75 146.725,119.325 U6.22@146.725,117.575
  Top Layer w2: L2.1 137.856,117.156 141.525,120.825 C2.1@144.5,120.825
NetC2_2: C2.2 U6.21 | length 3.5
  Top Layer w0.5: C2.2@147.05,120.925 147.375,120.6 U6.21@147.375,117.55
NetC4_2: C4.2 U6.5 | length 3.9
  Top Layer w0.305: C4.2@146.15,109.2 148.025,111.075 U6.5@148.025,112.275
NetC9_1: C9.1 U6.6 | length 3.9
  Top Layer w0.305: C9.1 147.8,109.65 148.675,110.525 U6.6@148.675,112.275
NetC10_2: C10.2 U6.7 | length 3.9
  Top Layer w0.305: U6.7@149.325,112.275 149.325,110.4 150,109.725 C10.2
NetC11_1: C11.1 C15.1 L3.2 | length 12.3
  Top Layer w1.27: L3.2 168.75,117.175 C11.1 171.075,108.975 C15.1
NetC12_1: C12.1 U6.16 | length 3
  Top Layer w0.5: U6.16@150.625,117.5 C12.1@150.625,120.475
NetC12_2: C12.2 L3.1 U6.15 | length 15.8
  Top Layer w0.5: U6.15@151.275,117.55 151.275,119.4 151.6,119.725 152.1,119.725 152.6,120.225 152.6,120.65 152.625,120.625 C12.2@152.625,121.075
  Top Layer w0.75: L3.1@163.075,117.45 L3.1@163.125,117.4
  Top Layer w2: C12.2@153.2,120.875 159.55,120.875 L3.1
NetC14_2: C14.2 U6.11 | length 4.2
  Top Layer w0.305: U6.11@151.925,112.275 151.925,113.325 152.225,113.625 153.375,113.625 153.725,113.275 C14.2
NetC45_1: C45.1 U8.9 | length 5.1
  Top Layer w0.3: C45.1 159.4,82.775 158.975,83.2 158.975,85.575 159.275,85.875 U8.9
NetC45_2: C45.2 U8.2 | length 5.4
  Top Layer w0.3: U8.2 157.6,85.875 157.975,85.5 157.975,83.2 157.575,82.8 157.575,82.2 C45.2
NetC46_1: C46.1 U8.3 | length 2.9
  Top Layer w0.3: C46.1@153.3,85.375 U8.3
NetD2_1: D2.1 P9.1 P10.1 VT1.3 | length 11.4
  Top Layer w0.5: VT1.3 149.45,91.11 P9.1 149.44,91.8 154.935,91.8 155.275,91.46 P10.1
Netld1_2: ld1.2 R1.2 | length 4.2
  Top Layer w0.3: R1.2 176.225,59.25 ld1.2
Netld2_2: ld2.2 R2.2 | length 4
  Top Layer w0.3: R2.2 173.95,59.625 ld2.2
NetR10_1: R10.1 VT3.4 VT4.3 | length 17.4
  Top Layer w0.5: R10.1 126.65,62.2 VT4.3 132,64.475 133.125,63.35 133.125,59.175 132.52,58.57 VT3.4
NetR12_2: R12.2 VT4.1 | length 5.7
  Top Layer w0.5: VT4.1 125.425,65.425 125.975,65.975 R12.2
NetR13_2: R13.2 VT1.1 | length 2.6
  Top Layer w0.5: R13.2 148.5,84.15 VT1.1
NetR18_2: R18.2 VT2.1 | length 3.1
  Top Layer w0.5: R18.2@163.45,80.725 R18.2@163.675,80.95 ; R18.2 R18.2@163.675,80.95 ; VT2.1 164,81.85 163.675,81.525 R18.2@163.675,80.95
NetR35_2: R35.2 U6.4 | length 14.6
  Top Layer w0.305: R35.2 144.425,100.975 144.425,109.575 145.025,110.175 146.425,110.175 147.375,111.125 U6.4@147.375,112.275
R_OUT: C15.2 P3.2 | length 7
  Top Layer w1.27: P3.2 176.075,114.11 176.075,107.275
reset: B2.1 R8.1 U3.14 | length 22.4
  Top Layer w0.3: U3.14 149.35,62.3 149.675,61.975 153.275,61.975 155.875,64.575 160.875,64.575 161.475,65.175 R8.1 161.475,68.3 163.525,70.35 B2.1
Sharp: P6.1 U3.7 | length 21.8
  Top Layer w0.3: P6.1 140.175,82.345 140.175,78.65 140.168,78.643 140.168,77.507 145.85,71.825 U3.7
SND_GND: C10.1 P1.3 U6.8 U6.9 | length 13.7
  Top Layer w0.305: U6.8@149.975,112.275 149.975,111.15 150.25,110.875 150.25,110.3 150.45,110.1 ; C10.1 150.4,106.9 151.125,107.625 151.125,109.425 150.45,110.1 ; U6.9@150.625,112.275 150.65,112.25 150.65,111.025 150.45,110.825 150.45,110.1
  Top Layer w0.75: C10.1 150,105.4 P1.3@151.605,103.795 ; P1.3@151.605,103.3 P1.3@151.605,103.795 ; P1.3@152.005,103.395 P1.3@151.605,103.795
SYSTEM_12: P4.1 VT3.5 VT3.6 VT3.7 VT3.8 | length 27.6
  Top Layer w2: 135.513,59.325 138.95,59.325 136.525,61.75 135.525,61.75 ; 139.175,59.1 143.1,55.175 144.95,55.175 152.7,47.425 P4.1
Tacho_fan1: P9.3 R9.1 U3.29 | length 56.4
  Top Layer w0.3: U3.29 158.1,69.525 160.15,71.575 160.15,73.55 157.7,76 v2(157.7,76.225) 157.1,76.825 R9.1 ; R9.1@156.85,77.675 R9.1@156.925,77.75
  Bottom Layer w0.3: P9.3 151.55,96.54 153.06,98.05 157.95,98.05 159.225,96.775 159.225,95.261 161.325,93.161 161.325,88.236 164.9,84.661 164.9,80.175 162.312,77.588 162.312,75.587 161.25,74.525 158.075,74.525 157.7,74.9 v2(157.7,76.225)
Tacho_fan2: P10.3 R11.1 U3.28 | length 40.4
  Top Layer w0.3: U3.28 158.75,69.025 160.825,71.1 160.825,74.65 v2(159.875,75.6) 159.275,76.2 R11.1@159.275,77.825
  Bottom Layer w0.3: P10.3@157.025,96.3 P10.3 157.31,96.54 160.875,92.975 160.875,88.05 163.925,85 163.925,80.6 159.875,76.55 v2(159.875,75.6)
Term: P5.1 R5.1 U3.59 U3.60 | length 24.4
  Top Layer w0.3: U3.60 142.79,78.335 ; U3.59 143.35,78 143.015,78.335 142.79,78.335 ; R5.1 142.825,91.3 P5.1 139.6,91.3 137.375,89.075 137.375,85.725 139.1,84 141.275,84 142.55,82.725 142.55,78.575 142.79,78.335
USB_DM: P13.2 U1.9 | length 5.7
  Top Layer w0.3: P13.2 165.55,56.4 167.177,58.027 U1.9
USB_DP: P13.3 U1.8 | length 9.9
  Top Layer w0.3: U1.8 163.725,57.577 163.725,52.65 164.262,52.113 166.063,52.113 166.35,52.4 P13.3
pads on no net: P13.4 P13.6 P13.7 P13.8 P13.9 P13.MH1 P13.MH2 R15.1 U1.15 U1.16 U3.1 U3.2 U3.3 U3.4 U3.5 U3.6 U3.11 U3.13 U3.15 U3.16 U3.17 U3.18 U3.19 U3.20 U3.22 U3.23 U3.25 U3.26 U3.27 U3.30 U3.31 U3.32 U3.35 U3.36 U3.37 U3.38 U3.39 U3.40 U3.44 U3.45 U3.48 U3.51 U3.52 U3.53 U3.54 U3.55 U3.58 U3.61 U3.64 U3.65 U3.68 U3.69 U3.70 U3.72 U3.75
copper on no net: | length 0.6
  Top Layer w0.3: 142.79,62.79 142.79,63.375

## Polygon pours and split planes (outlines as drawn)
GND on Bottom Layer "Top Layer-No Net" (solid, remove dead copper, pour order 7): 120.2,122.706 120.2,45.25 177.625,45.25 177.625,122.706
GND on Top Layer "Top Layer-No Net" (solid, remove dead copper, pour order 9): 177.631,122.7 177.631,45.75 120.375,45.75 120.375,122.7

## Silkscreen, mask and mechanical layers (free items; w line width, h text height)
Top Overlay:
  lines w0.254: 146.15,90.075 146.15,91.9 146.15,99.725 166.425,99.725 166.425,94.725 ; 119,44.375 179.006,44.375 179.006,124.075 119,124.075 119,44.375
  text "Audio Amp" at 131.625,121.925 h1.52
  text "LOUT" at 126.075,116.45 h1.02 r270
  text "ROUT" at 172.7,112.925 h1.02 r90
  text "Audio In" at 145.125,101.175 h0.52 r90
  text "! 12V !" at 158.15,100.225 h1.52
  text "Temp" at 137.875,98.225 h0.76
  text "tx" at 161.012,93.951 h0.52
  text "rx" at 160.987,91.426 h0.52
  text "Rx" at 172.85,63.025 h1.52
  text "Tx" at 175.5,63.025 h1.52
  text "+12V In" at 129.4,55.325 h0.76
  text "12V Out 2" at 151.125,55.15 h0.76
  text "12V Out 1" at 140.15,55.025 h0.76
Bottom Overlay:
  text "Murinets" at 170.325,119.75 h1.52
  text "www.noon3d.ru" at 170.325,118.025 h1.02
  text "murinets.d@ya.ru" at 170.32,116.365 h1.2 r0.43
  text "v2.5, 2018" at 170.325,114.559 h1

## Text inside footprints (layer, text, board x,y; h text height)
P13: Mechanical 1 "PCB Edge" at 162.314,45.518 h0.25